# EAGLE board stecker_umrisse_dimmer_geh (EAGLE 4.16)
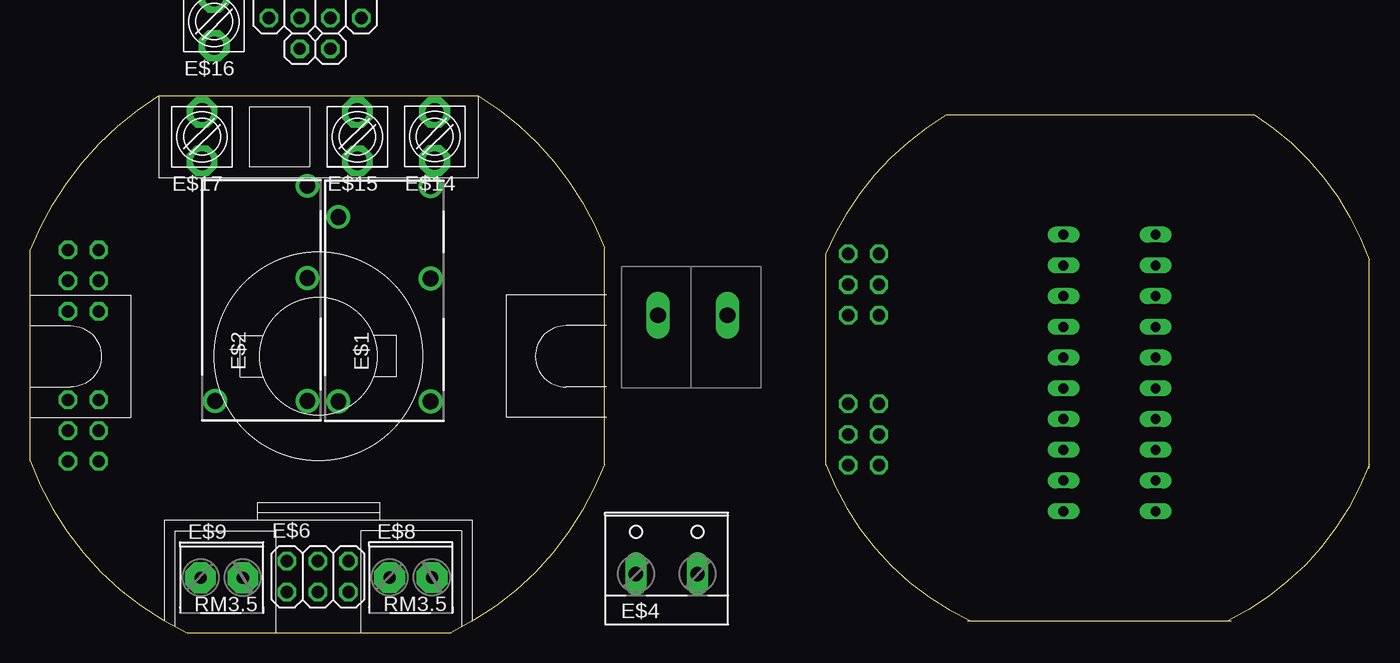
[diagram p0: board, top side]
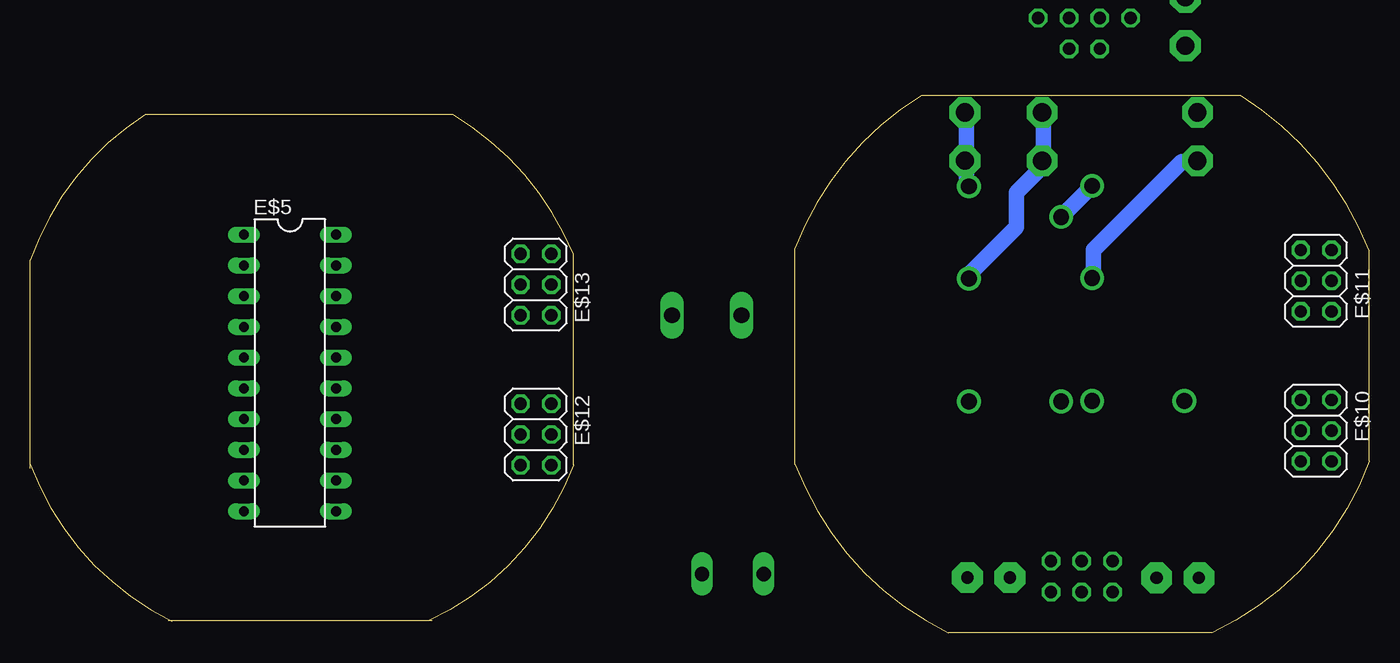
[diagram p1: board, bottom side, seen from below]

Size 110.61 x 44.38 mm. Coordinates in mm from the lower left corner, seen from the top.
Outline: 10.62,44.38 36.96,44.38
Outline: 47.42,13.9 47.43,31.75
Outline: 12.95,0 34.75,0
Outline: 12.95,0 arc-44 0,14.19 0,31.58 arc-36 10.61,44.39
Outline: 36.98,44.38 arc-38 47.43,31.76
Outline: 47.42,13.91 arc-44 34.75,0
Outline: 75.7,42.8 101.11,42.8 arc-38 110.61,30.8
Outline: 110.6,13.58 110.61,30.8
Outline: 77.4,0.95 99.2,0.95
Outline: 77.72,0.95 arc-44 65.72,13.88 65.72,31.26 arc-36 75.7,42.8
Outline: 110.6,13.91 arc-44 98.89,0.95
Copper layers (1*16): Top 0.035mm / dielectric 1.5mm / Bottom 0.035mm
Design rules "default": minimum track width 10mil, minimum drill 24mil, track to track 8mil, track to pad 8mil, pad to pad 8mil, via to via 8mil, smd to smd 8mil, copper to edge 40mil, drill to drill 8mil, minimum pad ring 10mil, minimum via ring 8mil, stop-mask expansion 4mil, vias tented up to drill 0mil, thermal gap 10mil

## Footprints (pad centres in the part's own frame; a part is rotated, then mirrored left to right if it is on the bottom)
G5Q_1_EU = drill 1.3 round: 11 1.27,-3.81; 12 6.35,3.81; 14 8.89,-3.81; A1 -8.89,-3.81; A2 -8.89,3.81
RE-SCHRACK = drill 1.3 round: 11 8.89,-3.81; 14 1.27,-3.81; A1 -8.89,-3.81; A2 -8.89,3.81
12CROSS = drill 1.016 octagon: 1 -3.81,-1.27; 2 -3.81,1.27; 3 -1.27,-1.27; 4 -1.27,1.27; 5 1.27,-1.27; 6 1.27,1.27; 7 3.81,-1.27; 8 3.81,1.27; 9 1.27,-3.81; 10 -1.27,-3.81; 11 1.27,3.81; 12 -1.27,3.81
W237-132 = drill 1.194 long: 1 -2.54,-0.635; 2 2.54,-0.635
DIL20 = drill 0.813 long: 1 -11.43,-3.81; 2 -8.89,-3.81; 3 -6.35,-3.81; 4 -3.81,-3.81; 5 -1.27,-3.81; 6 1.27,-3.81; 7 3.81,-3.81; 8 6.35,-3.81; 9 8.89,-3.81; 10 11.43,-3.81; 11 11.43,3.81; 12 8.89,3.81; 13 6.35,3.81; 14 3.81,3.81; 15 1.27,3.81; 16 -1.27,3.81; 17 -3.81,3.81; 18 -6.35,3.81; 19 -8.89,3.81; 20 -11.43,3.81
2X03 = drill 1.016 octagon: 1 -2.54,-1.27; 2 -2.54,1.27; 3 0,-1.27; 4 0,1.27; 5 2.54,-1.27; 6 2.54,1.27
BUSKLEMME243-724 = drill 1.3 long: 1 -2.875,0; 2 2.875,0
AKL3.5X2 = drill 1 pad 2.54 octagon: 1 -1.75,-0.1; 2 1.75,-0.1
CONRAD731838 = drill 1.5 pad 2.54 octagon: P$1 0,2; P$2 0,-2

## Placement (x,y rotation side)
E$1  [G5Q_1_EU]  29.26,27.99 90 top
E$2  [RE-SCHRACK]  19.09,28.03 90 top
E$3  [12CROSS]  23.53,52.06 0 top  (outside the outline)
E$4  [W237-132]  52.58,5.48 0 top
E$5  [DIL20]  89.16,21.45 270 bottom
E$6  [2X03]  23.75,4.63 0 top
E$7  [BUSKLEMME243-724]  54.73,26.23 0 top
E$8  [AKL3.5X2]  31.44,4.64 0 top
E$9  [AKL3.5X2]  15.81,4.63 0 top
E$10  [2X03]  4.38,16.69 90 bottom
E$11  [2X03]  4.38,29.07 90 bottom
E$12  [2X03]  68.84,16.37 90 bottom
E$13  [2X03]  68.84,28.76 90 bottom
E$14  [CONRAD731838]  33.41,40.99 0 top
E$15  [CONRAD731838]  27.02,40.98 0 top
E$16  [CONRAD731838]  15.18,50.51 0 top  (outside the outline)
E$17  [CONRAD731838]  14.19,40.98 0 top

## Library data of the parts
E$1 E$2 = freebus_relay
E$3 E$6 E$10-E$13 = pinhead
E$4 = con-wago-508
E$5 = ic-package
E$7 = con-wago
E$8 E$9 E$14-E$17 = con-wago-500

## Tracks (layer width: path | path; a pad name or v marks a point on that pad's centre or on a via)
S$1
  Bottom 1.27: 32.96,37.01 33.28,37.01 33.28,39.24 | 33.28,43.05 33.28,39.24 | 33.28,39.24 33.59,39.24 33.59,38.92
S$2
  Bottom 1.27: 26.93,43.05 26.93,38.6 29.15,36.38 29.15,33.52 33.28,29.39
S$3
  Bottom 1.27: 22.8,37.01 25.34,34.47
S$4
  Bottom 1.27: 14.23,38.92 15.5,38.92 22.8,31.61 22.8,29.39

## Text on the board
tValues: Bus | ext/sensor